# Altium PCB PCB1_DEC25.pcbdoc (part 2 of 2)
Units mil, origin at the board's own origin, x right, y up, seen from the top; angles counter-clockwise.
Board outline 3300 x 2250 mil, 2 copper layers (Top Layer, Bottom Layer); 80 components, 60 nets, 287 pads, 192 vias.
Unrouted connection lines stored in the file: 3.
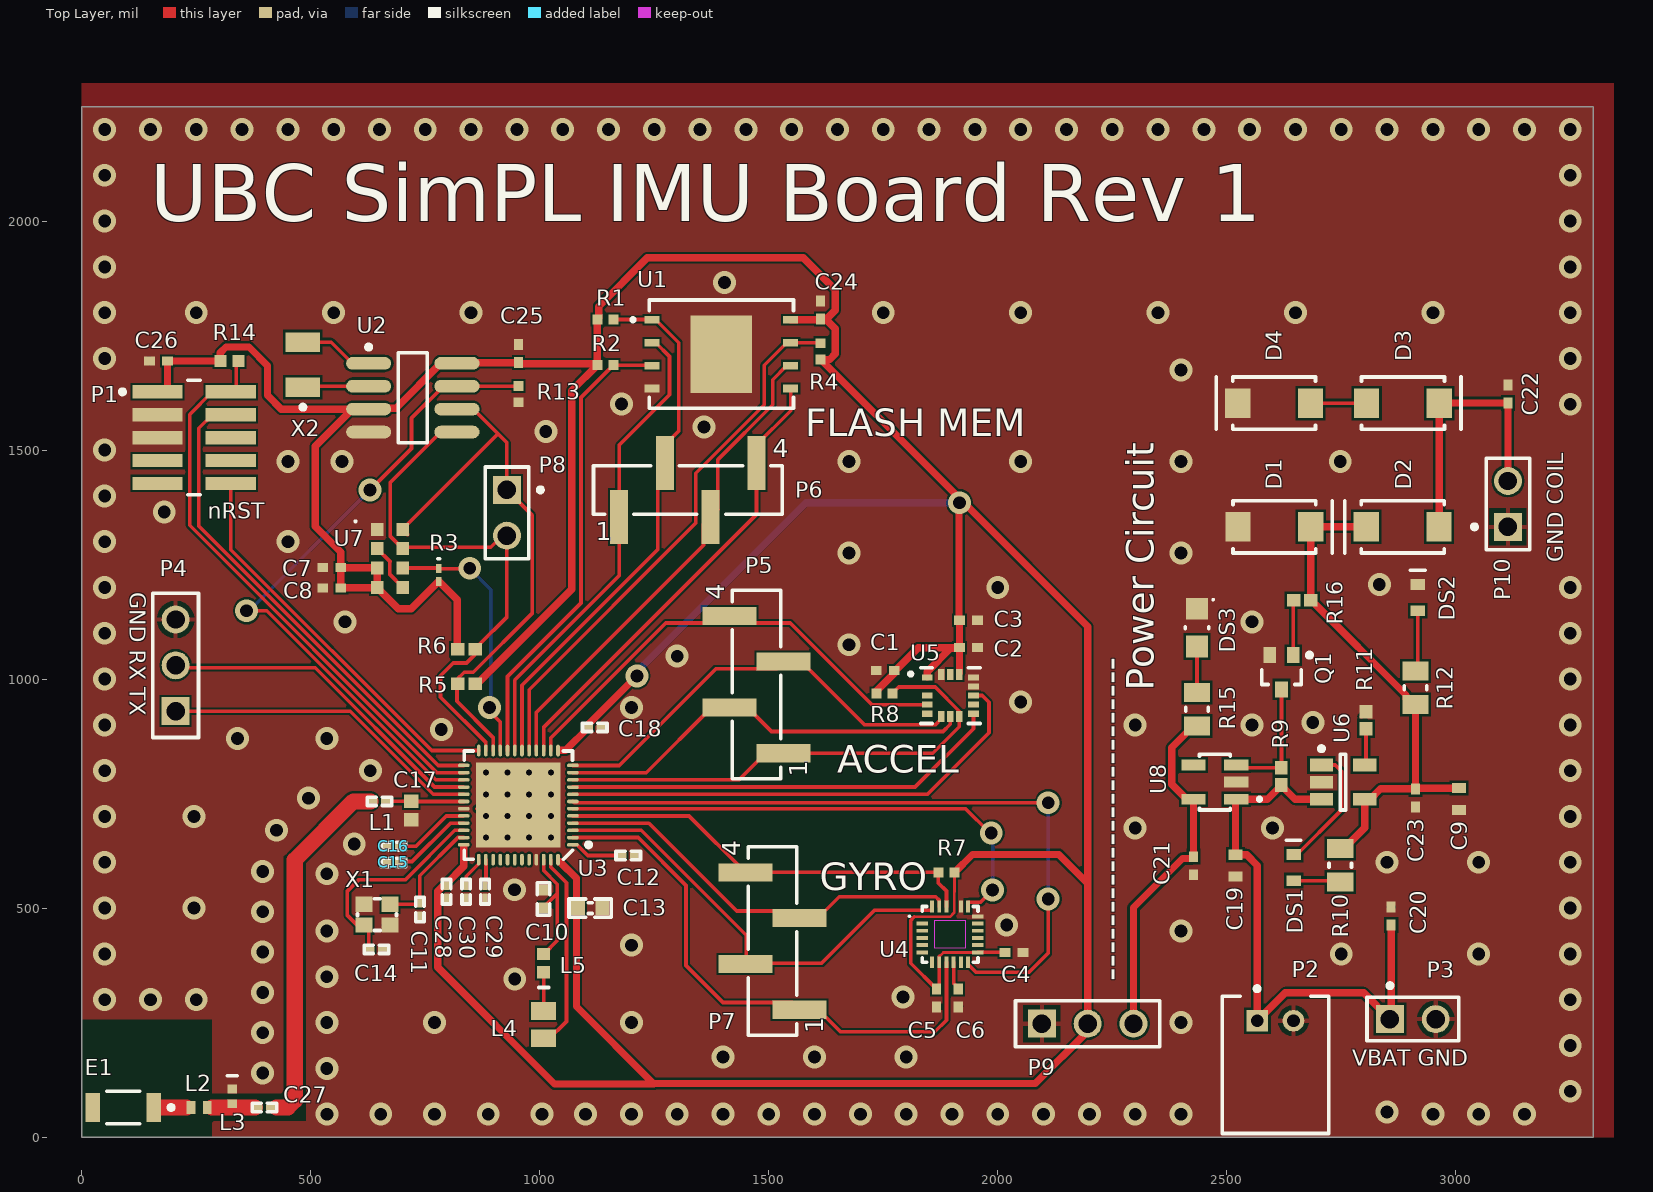
[diagram p0: Top Layer view]

## Via types
v1: diameter 50, hole 28, Top Layer to Bottom Layer, 176 vias
v2: diameter 25.98, hole 12.99, Top Layer to Bottom Layer, 16 vias

## Nets (pads, with @x,y where several pads share a name; then routed paths per layer and width w, separated by ;. In a path a pad name is that pad's centre, name@x,y a point inside that pad or via, vN(x,y) a via of type N, cw(c..) or ccw(c..) an arc to the next point about the centre after c; other vN are vias at no path point) (continued)
GYRO_CS: (continued)
  Top Layer w8: U3.5 1325.97,701.23 P7.4 R7.1 1870.29,554.71 1887.84,537.16 U4.22@1887.84,503.44
GYRO_INT1: U3.7 U4.12 | length 1566.5
  Top Layer w8: U3.7 1075.04,730 v1(2110,730) ; U4.12@1935.09,377.41 1952.53,359.97 2068.19,359.97 2110,401.78 v1(2110,520)
  Bottom Layer w8: v1(2110,520) v1(2110,730)
GYRO_INT2: U3.6 U4.19 | length 1134.9
  Top Layer w8: U3.6 1929.71,716.98 1982.46,664.22 v1(1985.72,664.22) ; U4.19 1935.18,511.7 U4.19@1936.51,513.03 ; U4.19@1936.42,513.03 1962.62,513.03 v1(1988.81,539.22)
  Bottom Layer w8: v1(1985.72,664.22) 1988.81,661.13 v1(1988.81,539.22)
GYRO_MISO: P7.2 U3.3 U4.24 | length 998
  Top Layer w8: U3.3 1221.53,669.74 1450.72,440.54 ; P7.2@1449.26,378.04 1450.81,379.6 1450.81,440.54 ; P7.2@1450.72,379.6 1615.2,379.6 1730.91,495.31 U4.24@1856.02,495.31 ; U4.24@1856.11,495.31 1856.44,495.64 U4.24
GYRO_MOSI: P7.1 U3.2 U4.9 | length 1230.5
  Top Layer w8: U3.2 1214.77,653.99 1319.21,549.55 1319.21,374.56 1400.03,293.73 1551.59,293.73 P7.1 ; P7.1@1567.37,278.04 1608.31,278.04 1656.36,230 1862.46,230 1887.84,255.39 U4.9@1887.84,381.78
GYRO_SCLK: P7.3 U3.4 U4.23 | length 922.3
  Top Layer w8: U3.4 1238.28,685.48 1430.03,493.73 1551.59,493.73 P7.3 ; P7.3@1567.37,478.04 P7.3@1606.74,478.04 ; P7.3@1606.64,478.04 1653.63,525.03 1864.41,525.03 ; 1864.5,525.03 1871.86,517.68 1871.86,503.77 U4.23
I2C_SCL: P8.1 R5.1 U2.6 U3.22 U7.8 | length 1256.9
  Top Layer w8: U7.8@700.34,1327.06 U7.8 908.67,1535.38 ; U7.8 700.44,1326.57 U7.8@711.22,1315.79 ; U2.6 854.62,1589.44 908.67,1535.38 ; R5.1@830.5,984.85 R5.1@830.6,984.85 ; U3.22 898.1,872.7 819.18,951.61 819.18,999.06 834.98,1014.85 854.85,1014.85 983.22,1143.22 983.22,1358.04 P8.1 928.22,1515.84 908.67,1535.38
I2C_SDA: P8.2 R6.1 U2.5 U3.23 U7.7 | length 1160.7
  Top Layer w8: U7.7@700.34,1285.23 673.22,1312.35 673.22,1428.91 U2.5@783.75,1539.44 ; U7.7@700.44,1285.23 U7.7 U7.7@703.68,1287.98 ; U7.7@703.59,1287.98 U7.7@703.68,1287.98 ; 783.22,960.54 882.35,861.41 U3.23 ; 783.31,960.54 783.31,1007 811.31,1035 840,1035 858.7,1053.7 R6.1 ; U2.5@783.84,1539.44 U2.5 U2.5@819.28,1539.44 ; R6.1@867.01,1074.42 928.22,1135.63 P8.2 918.23,1313.04 893.16,1287.98 U7.7@703.68,1287.98
IR_INT: R3.1 U3.21 U7.6 | length 584.4
  Top Layer w8: U7.6@700.34,1242.41 U7.6 R3.1@777.98,1242.41 ; R3.1@778.07,1242.41 R3.1 ; R3.1@779.38,1241.01 R3.1 ; v1@857.75,1241.01 R3.1 ; v1@857.84,1241.01 v1@858.31,1240.54 ; v1@893.22,926.98 v1@893.22,938.04 ; v1@893.31,926.98 913.94,906.35 ; U3.21 913.85,906.35
  Bottom Layer w8: v1(847,1242) 893.22,1195.78 v1@893.22,938.04
  other v1: 890,938.04
MEM_CS: P6.2 R1.1 U1.1 U3.18 | length 1165.3
  Top Layer w8: U3.18 961.09,986.64 1257.53,1283.08 P6.2@1257.53,1456.41 ; R1.1@1160.93,1785.54 1161.45,1785.03 1244.49,1785.03 U1.1 ; U1.1@1253.27,1784.52 1303.22,1734.57 1303.22,1541.47 ; P6.2 P6.2@1273.22,1511.47 ; P6.2@1273.31,1511.47 1303.31,1541.47
MEM_MISO: P6.4 U1.5 U3.15 | length 1022.3
  Top Layer w8: U3.15 1008.34,894.34 1473.22,1359.22 P6.4 1473.22,1511.47 1547.76,1586.01 ; U1.5@1539.58,1634.52 U1.5 1547.85,1634.52 1547.85,1586.01
MEM_MOSI: P6.1 U1.2 U3.19 | length 1051.2
  Top Layer w8: U3.19 945.34,997.77 1173.22,1225.64 P6.1 1173.22,1510.54 1283.22,1620.54 1283.22,1704.57 1253.27,1734.52 U1.2
MEM_SCLK: P6.3 U1.6 U3.16 | length 1075.4
  Top Layer w8: U3.16 992.59,927.41 1357.53,1292.36 P6.3@1357.53,1338.3 ; P6.3@1357.63,1338.3 P6.3@1389,1369.67 ; P6.3@1388.9,1369.67 1388.9,1479.25 1508.39,1598.73 1508.39,1653.42 U1.6@1539.49,1684.52 ; U1.6@1539.58,1684.52 U1.6 U1.6@1547.85,1684.52
MEM_SPI_HOLD: R4.1 U1.7 U3.17 | length 1197.4
  Top Layer w8: U3.17 976.84,976.84 1340.77,1340.77 1340.77,1449.5 1490,1598.73 1490,1685.03 1539.49,1734.52 U1.7 R4.1@1613.22,1734.52
MEM_SPI_W: R2.1 U1.3 U3.20 | length 1021.9
  Top Layer w8: U3.20 929.6,1005.49 1090.02,1165.92 1090.02,1614.63 1160.93,1685.54 1161.45,1685.03 1244.49,1685.03 U1.3
NetC6_1: C6.1 U4.10 | length 62.8
  Top Layer w8: 1903.59,335.13 U4.10@1903.59,381.78 ; 1903.69,335.13 1913.69,325.13 C6.1
NetC17_2: C17.2 L1.1 U3.30 | length 171.5
  Top Layer w8: L1.1@672.94,733.09 C17.2 720,734.08 721.35,732.73 U3.30 ; C17.2@721.39,735.48 C17.2@727.99,742.08
NetC27_1: C27.1 L2.1 L3.2 | length 94.8
  Top Layer w8: L2.1 L2.1@274.18,64.65
  Top Layer w35: 284.12,64.65 C27.1@378.68,64.65
NetC29_2: C29.2 U3.38 | length 57.3
  Top Layer w8: C29.2 880.31,553.26 882.45,555.39 U3.38
NetC30_2: C30.2 U3.37 | length 67.8
  Top Layer w8: C30.2 839.22,569.64 U3.37@866.6,597.03 ; U3.37@866.7,597.03 U3.37@866.7,605.76
NetD3_1: D3.1 D4.1 | length 122.7
  Top Layer w8: D4.1 D3.1
NetDS1_1: DS1.1 R10.1 | length 103.2
  Top Layer w8: DS1.1 2744.94,559.88 R10.1
NetDS1_2: DS1.2 U6.1 | length 289.3
  Top Layer w8: DS1.2@2649.47,613.3 2751.32,715.15 2751.32,797.93 2736.82,812.43 2706.85,812.43 U6.1 U6.1@2718.54,812.54
NetDS2_1: DS2.1 R12.1 | length 134.3
  Top Layer w8: R12.1@2917.01,1017.44 DS2.1 DS2.1@2918.82,1151.04
NetDS3_2: DS3.2 R15.1 | length 100.8
  Top Layer w8: R15.1 DS3.2
NetE1_1: E1.1 L2.2 | length 69.1
  Top Layer w35: E1.1@159.54,64.5 228.68,64.5
NetL4_1: L4.1 U3.47 | length 426.9
  Top Layer w8: L4.1@1016.21,210.41 1058.22,252.41 1058.22,555.54 ; U3.47@1024.18,605.76 1024.18,589.68 1058.31,555.54
NetL4_2: L4.2 L5.1 | length 90.1
  Top Layer w8: L4.2@1008.34,269.85 L5.1
NetQ1_1: Q1.1 R16.1 | length 120.4
  Top Layer w8: Q1.1 2645.1,1171.72 R16.1
NetQ1_3: Q1.3 R9.1 U8.3 | length 272.6
  Top Layer w8: U8.3 2527.05,806.13 R9.1 2619.51,806.66 Q1.3
NetR11_2: R11.2 U6.5 | length 80
  Top Layer w8: U6.5 2803.97,815.3 R11.2
NetU2_1: U2.1 X2.2 | length 162.7
  Top Layer w8: X2.2 544.69,1735.58 590.84,1689.44 U2.1
NetU2_2: U2.2 X2.1 | length 144.5
  Top Layer w8: X2.1@482.82,1637.16 X2.1@485.1,1639.44 ; X2.1@485.01,1639.44 U2.2
nRESET: P1.10 U3.24 | length 867.4
  Top Layer w8: P1.10 325.48,1282.59 764.12,843.95 U3.24
P0.27: U3.39
P0.28/AIN4: U3.40
RF: C27.2 L1.2 | length 789.3
  Top Layer w35: 425,65 450,65 465,80 465,605 593.08,733.08 L1.2@630,733.08
RST_CLK: R13.2 U2.7 U3.27 | length 1461.8
  Top Layer w8: v1(360,1149.24) 403.68,1149.24 772.95,779.97 U3.27 ; v1(629.53,1413.04) 720,1503.51 720,1569.86 U2.7@789.58,1639.44 ; U2.7@789.68,1639.44 U2.7 R13.2@952.29,1639.44 ; R13.2@952.39,1639.44 R13.2@952.82,1639.87
  Bottom Layer w8: v1(360,1149.24) 365.73,1149.24 v1(629.53,1413.04)
RX: P4.2 U3.28 | length 757.1
  Top Layer w8: P4.2@185,1025 509.53,1025 770.31,764.22 U3.28
SWDCLK: P1.4 U3.25 | length 1090.6
  Top Layer w8: 255.48,1547.5 255.48,1334.2 778.22,811.47 U3.25 ; 255.58,1547.5 285.22,1577.15 P1.4
SWDIO: P1.2 R14.1 U3.26 | length 1241.9
  Top Layer w8: P1.2@337.05,1638.72 P1.2 285.13,1627.15 235.48,1577.5 235.48,1335.82 775.58,795.72 U3.26 ; P1.2@337.15,1638.72 R14.1@337.15,1689.7
TX: P4.1 U3.29 | length 704.3
  Top Layer w8: P4.1@205,929.85 586.29,929.85 767.67,748.48 U3.29
VBAT: C19.2 C20.1 P2.1 P3.1 R9.2 U6.3 U8.1 | length 1274.3
  Top Layer w16: U6.3 2648.98,737.74 2618.97,767.74 2588.97,737.74 U8.1 2518.97,736.09 C19.2 2543.44,616.56 2566.85,593.15 P2.1 2627.85,315 2798.76,315 P3.1 2858.97,260.3 C20.1
VBUS: C9.2 C23.1 D1.2 D2.2 R10.2 R12.2 R16.2 U6.4 | length 1144.1
  Top Layer w16: R10.2 2755.69,629.84 2801.22,675.37 U6.4 2813.03,737.74 2835.59,760.3 C23.1 ; D2.2 D1.2 2683.21,1332.33 R16.2 2684.19,1172.43 2891.46,965.15 2891.46,957.28 2904.13,944.61 R12.2 C23.1 ; C9.2 3005.94,761.36 2913.07,761.36 C23.1
XC1: C14.2 U3.34 X1.1 | length 465.9
  Top Layer w8: C14.2@626.53,412.76 626.53,452.56 X1.1 600.8,462.96 580,483.76 580,537.33 604.22,561.54 706.22,561.54 814.41,669.74 ; C14.2@626.63,412.76 C14.2 ; 814.51,669.74 U3.34 U3.34@834.22,669.74
XC2: C11.2 U3.35 X1.3 | length 256.3
  Top Layer w8: X1.3 C11.2@735.66,508.24 ; C11.2@735.75,508.24 C11.2 ; C11.2@738.22,510.8 738.22,570.6 U3.35@821.6,653.99 ; U3.35@821.7,653.99 U3.35@834.22,653.99
pads on no net: E1.2 P1.6 P1.7 P1.8 P1.9 U3.41 U3.42 U3.43 U3.44 U4.1 U4.2 U4.3 U4.4 U4.5 U4.6 U4.7 U4.11 U4.14 U4.15 U4.16 U4.17 U4.21 U5.2 U5.3 U5.5 U5.10 U5.15 U8.4
copper on no net:
  other v2: 882.35,653.99 929.6,653.99 976.84,653.99 1024.08,653.99 882.35,701.23 929.6,701.23 976.84,701.23 1024.08,701.23 882.35,748.48 929.6,748.48 976.84,748.48 1024.08,748.48 882.35,795.72 929.6,795.72 976.84,795.72 1024.08,795.72

## Polygon pours and split planes (outlines as drawn)
GND on Top Layer "Top Layer-GND" (solid, remove dead copper, pour order 32): 0,256.87 285,256.87 285,95.97 435,95.97 440,100.97 440,613.23 605,740.97 490,611.59 490,35 285,35 285,0 3345,0 3345,2300.97 0,2300.97
GND on Bottom Layer "Bottom Layer-GND" (solid, remove dead copper, pour order 22): 285,256.89 285,0 3315,0 3315,2360 0,2360 0,256.89

## Silkscreen, mask and mechanical layers (free items; w line width, h text height)
Top Overlay:
  text "UBC SimPL IMU Board Rev 1" at 150,2000 h125
  text "FLASH MEM" at 1580,1530 h60
  text "nRST" at 275.48,1350.54 h35
  text "GND COIL" at 3235,1255 h35 r90
  text "GND RX TX" at 105,1190 h35 r270
  text "Power Circuit" at 2340,975 h60 r90
  text "ACCEL" at 1650,795.72 h60
  text "GYRO" at 1611.22,539.22 h60
  text "------------------------" at 2275,340 h60 r90
  text "VBAT GND" at 2773.82,155.43 h35

## Text inside footprints (layer, text, board x,y; h text height)
P5: Top Overlay "4" at 1402.35,1173.08 h40 r90; Top Overlay "1" at 1583.45,787.26 h40 r90
P6: Top Overlay "4" at 1508.26,1483.91 h40; Top Overlay "1" at 1122.43,1302.81 h40
P7: Top Overlay "1" at 1618.45,227.26 h40 r90; Top Overlay "4" at 1437.35,613.08 h40 r90